# Altium PCB ESP32_Board.PcbDoc
Units mm, origin at the board's own origin, x right, y up, seen from the top; angles counter-clockwise.
Board outline 50 x 50 mm, 4 copper layers (Top Layer, Int1 (GND), Int2 (PWR), Bottom Layer), stack 0.628 mm thick; 64 components, 47 nets, 210 pads, 156 vias.
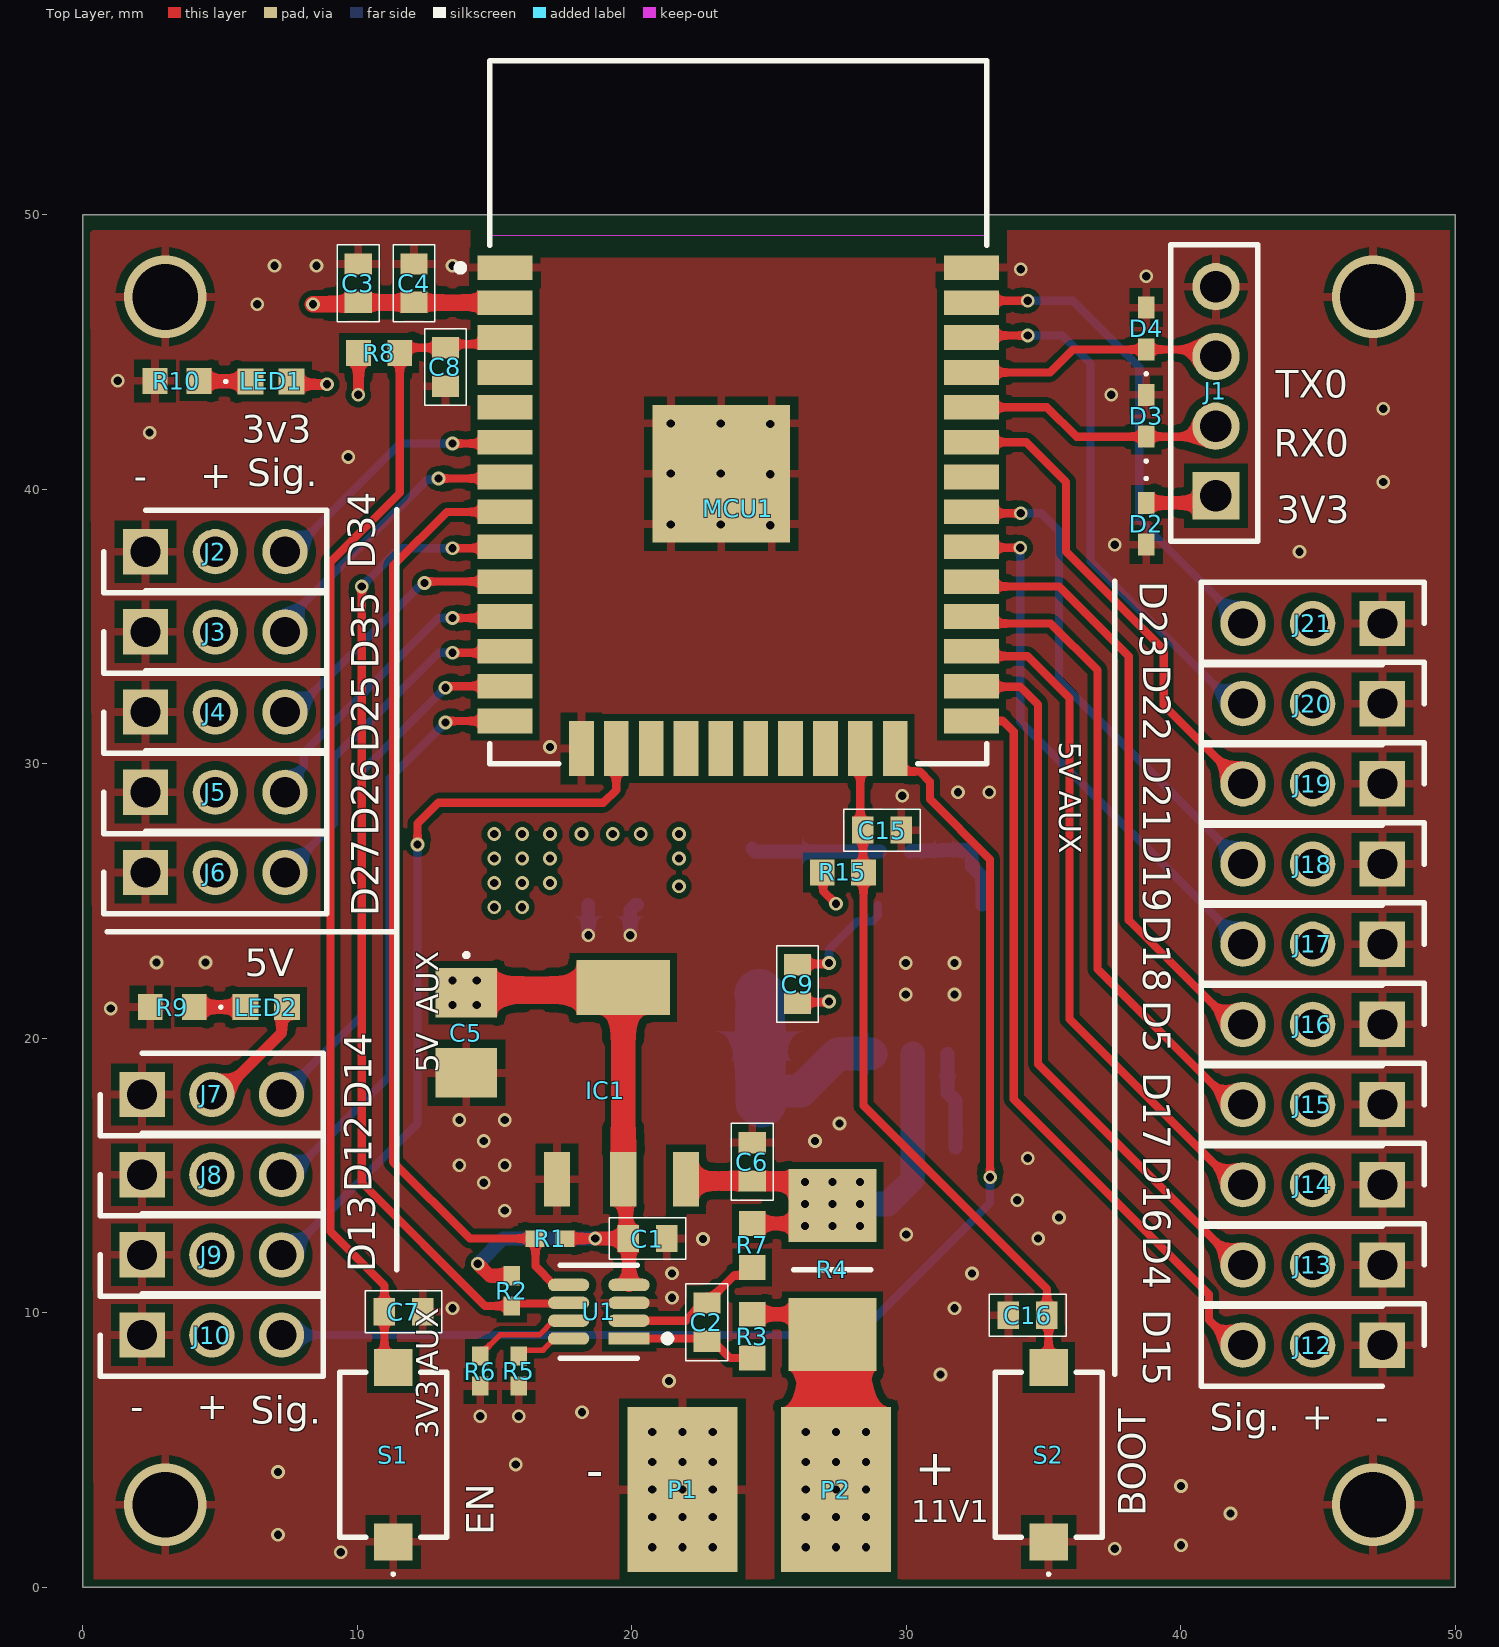
[diagram p0: Top Layer view]
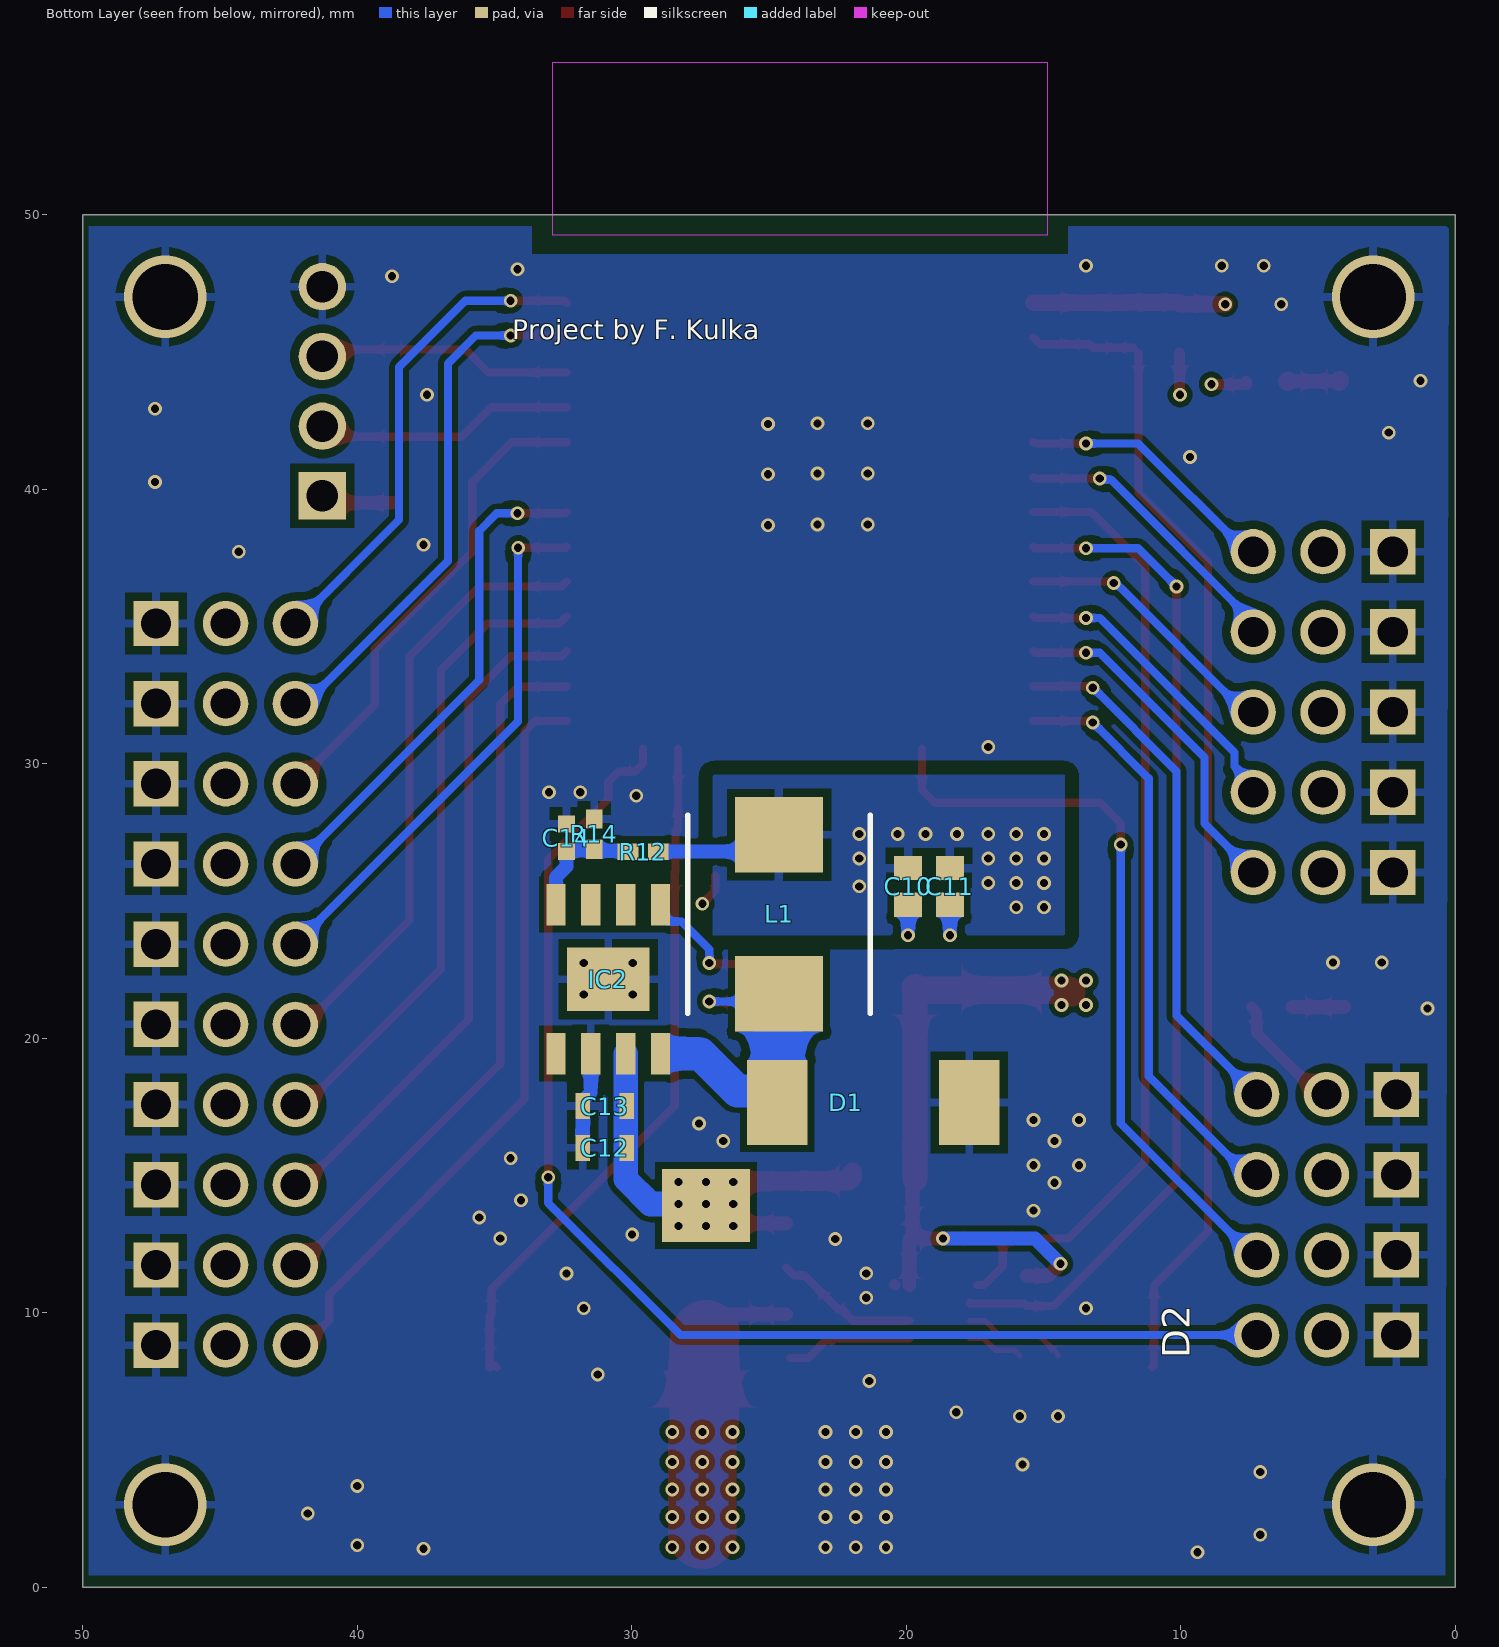
[diagram p1: Bottom Layer view, seen from below]
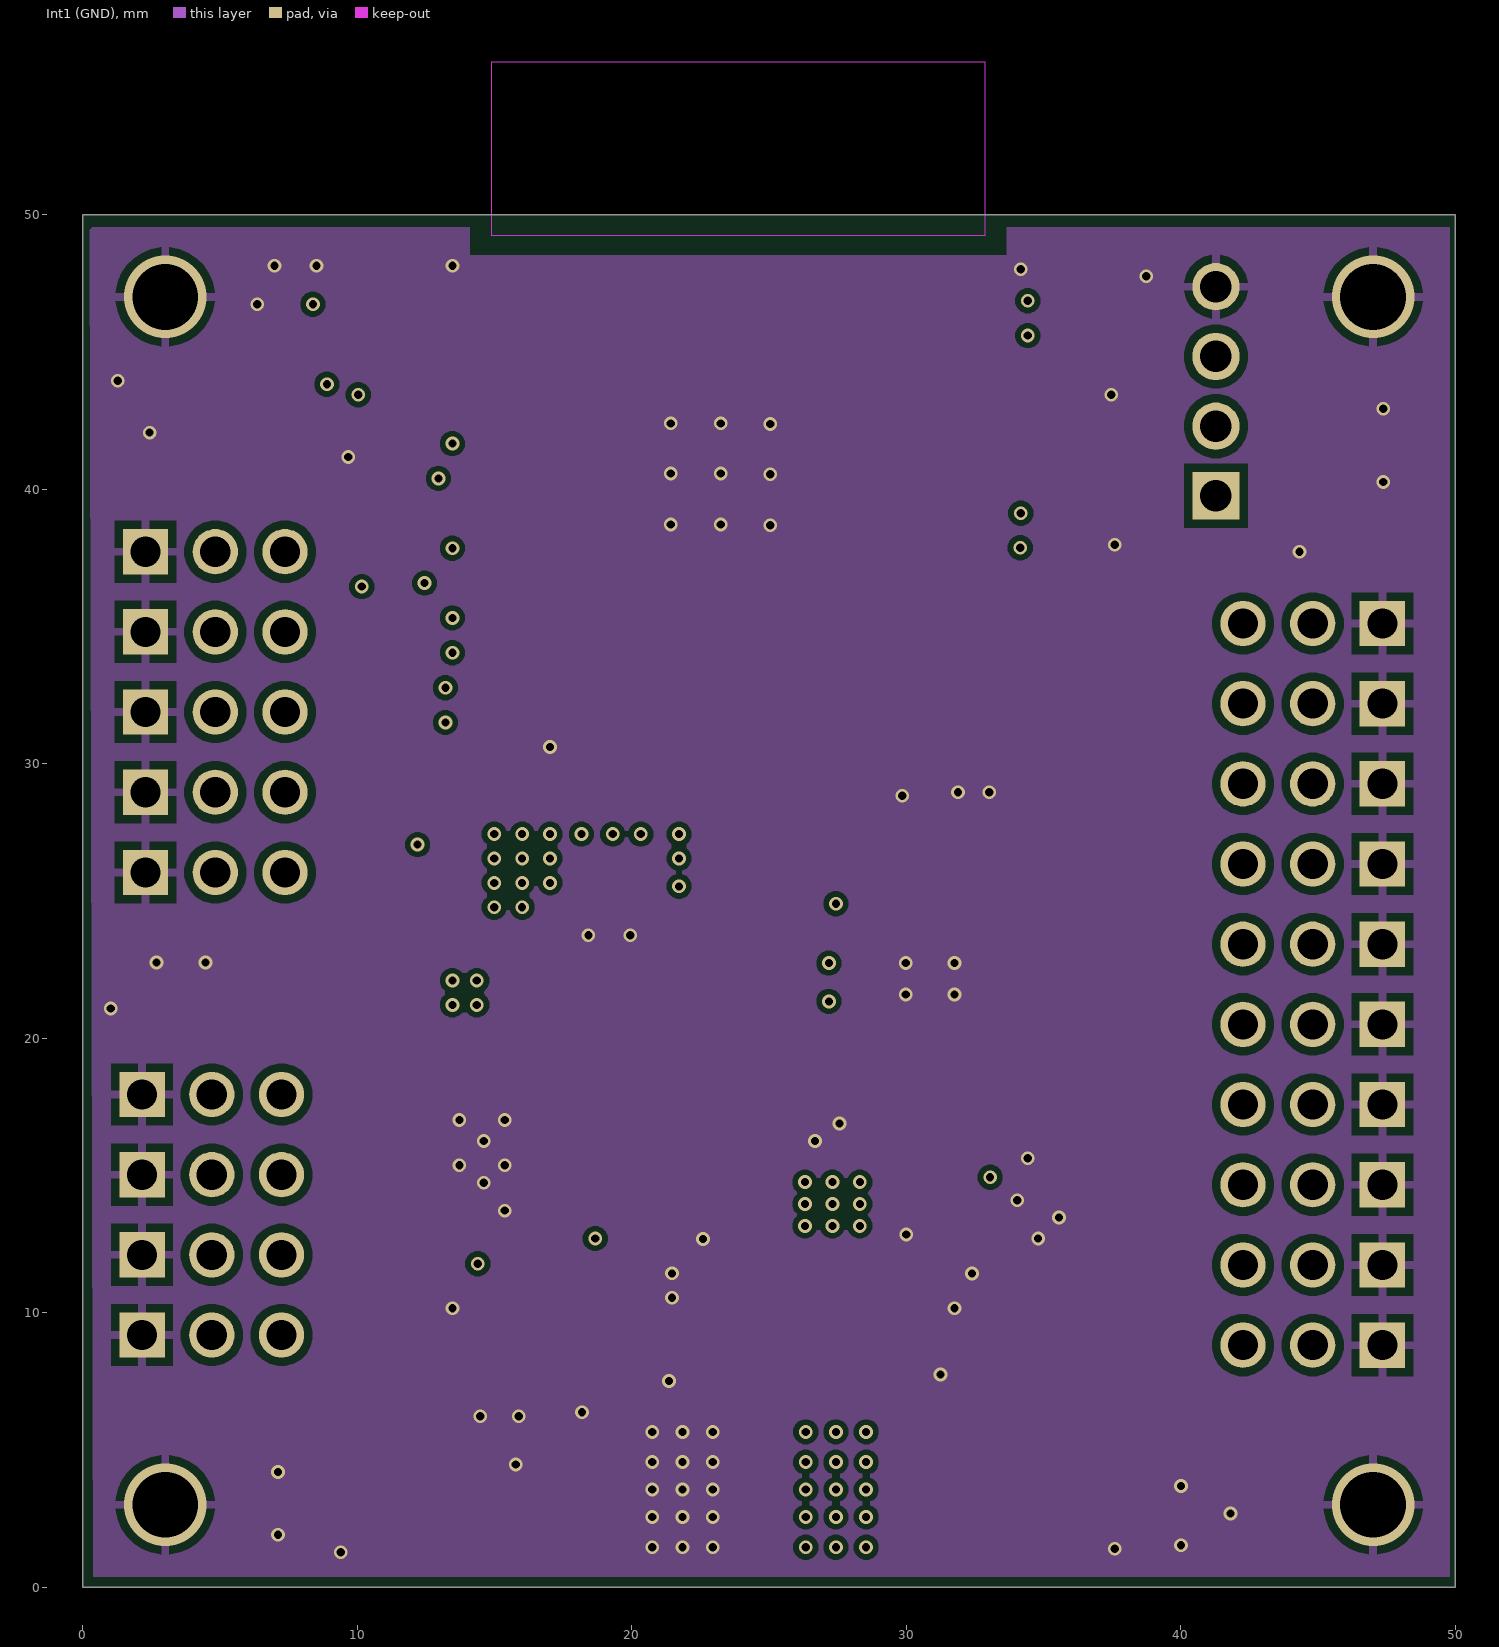
[diagram p2: Int1 (GND)]
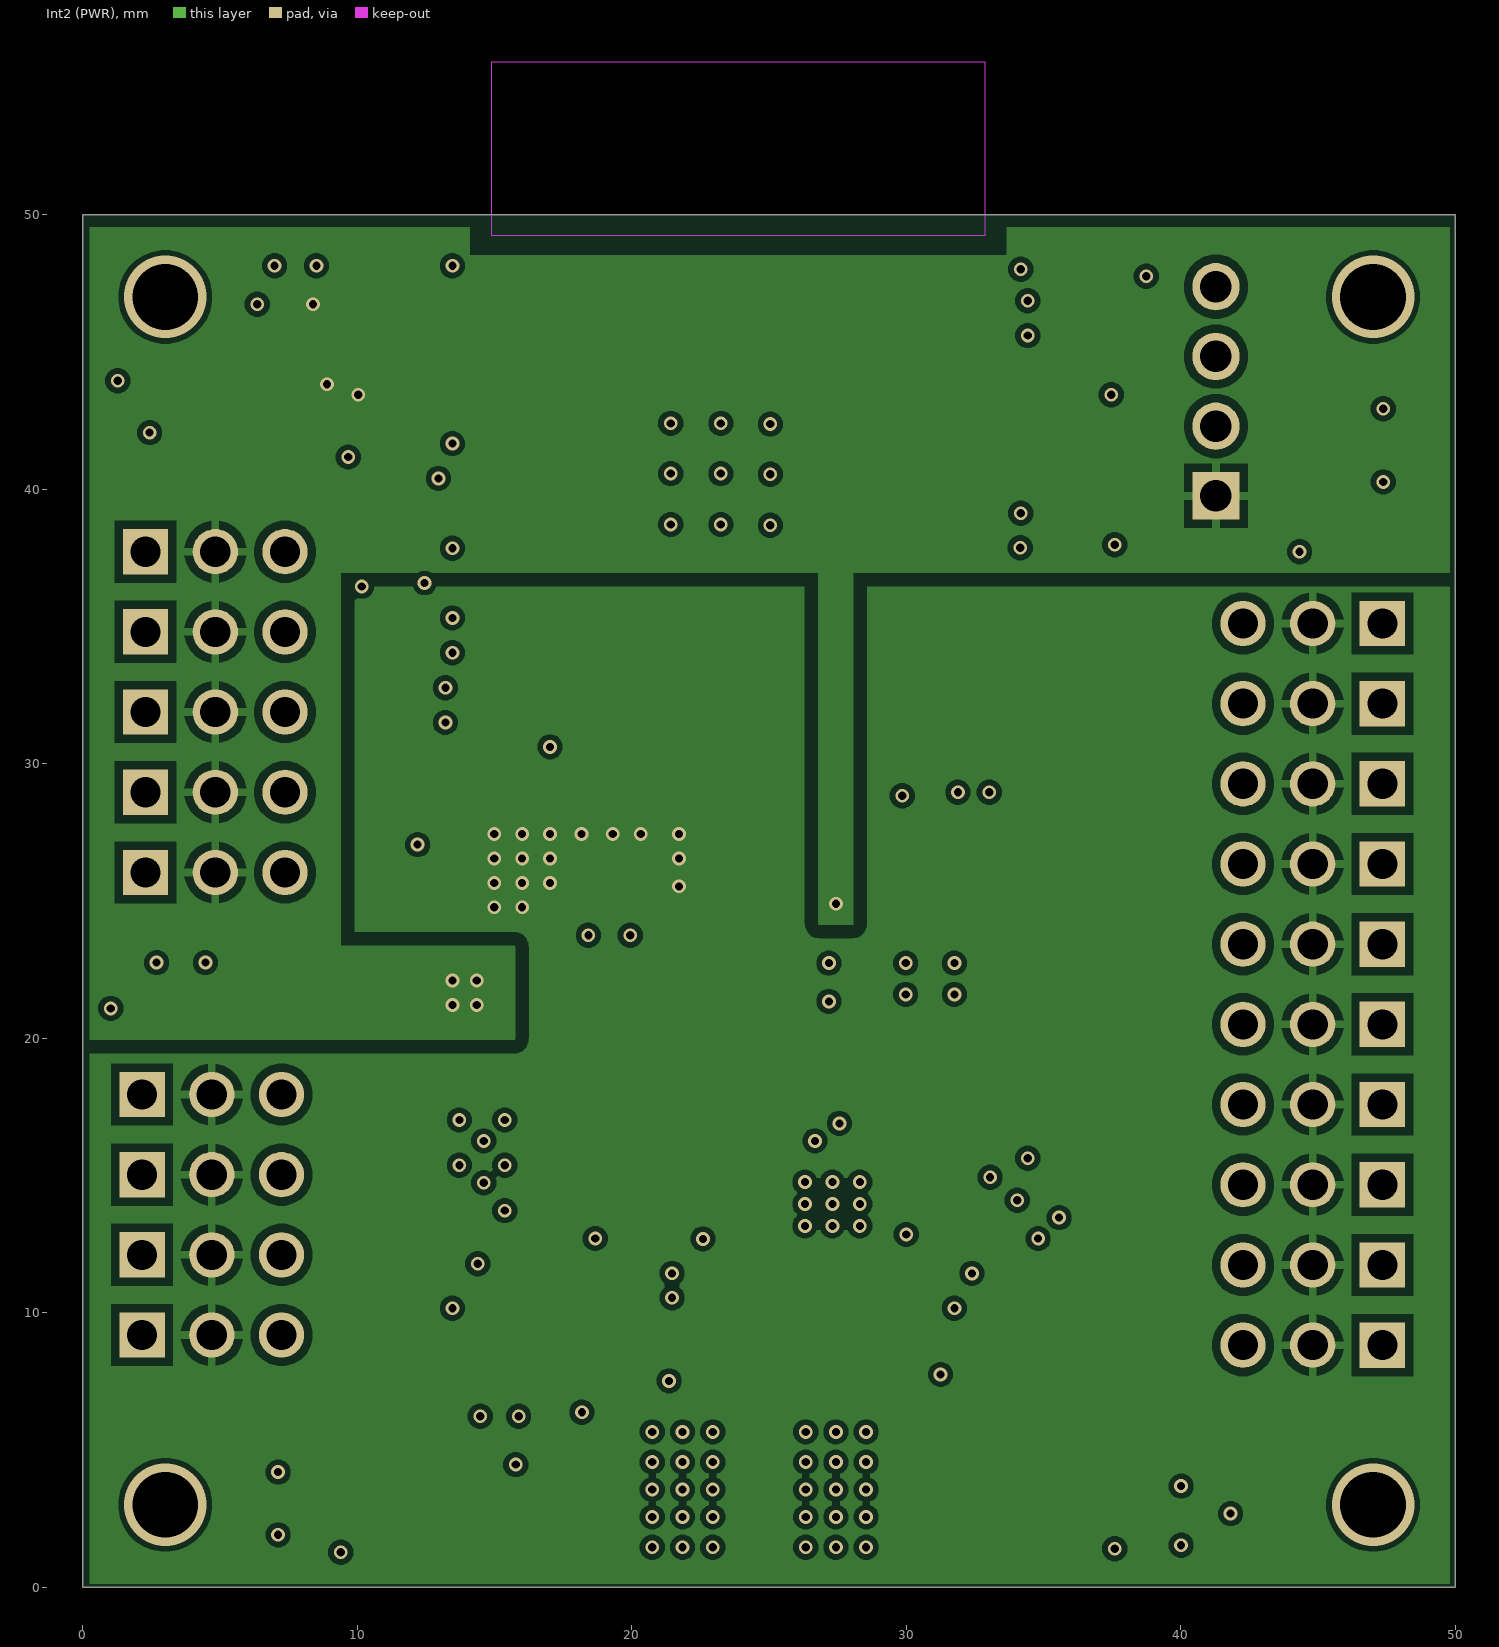
[diagram p3: Int2 (PWR)]
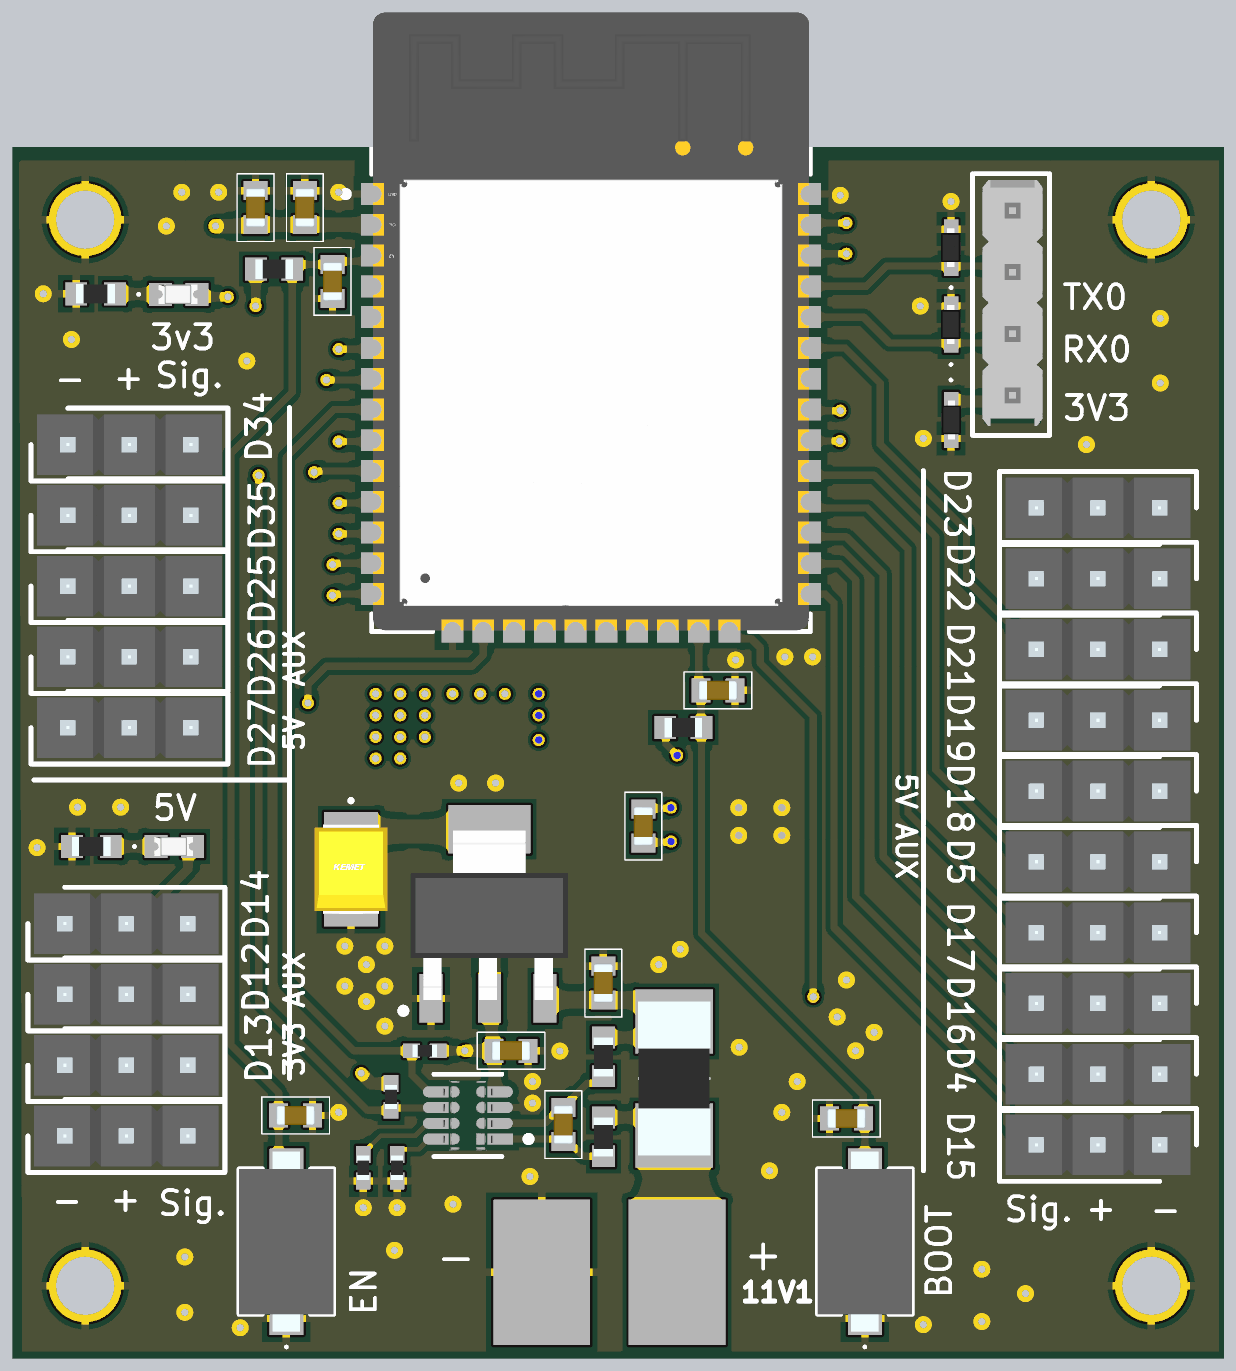
[diagram p4: 3D render of the assembled board from above, using the file's embedded part models]
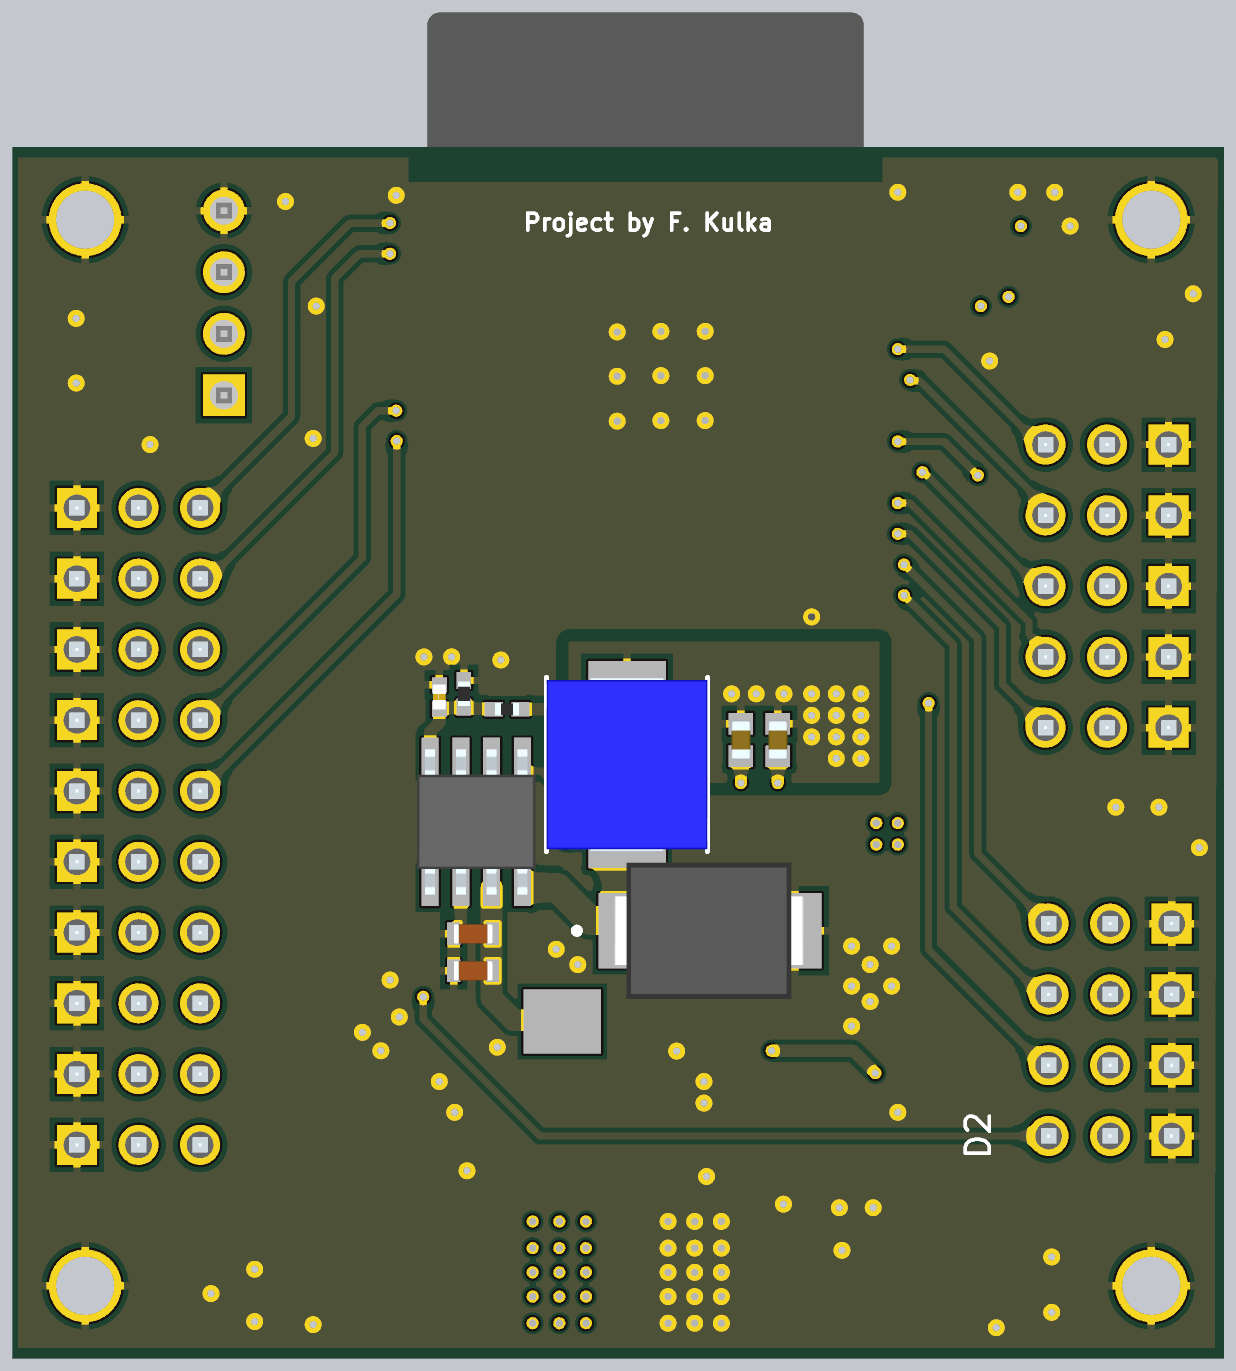
[diagram p5: 3D render of the assembled board from below, using the file's embedded part models]

## Layer stack, top to bottom
Top Solder: solder mask 0.0254, SM-001, Dk 4
Top Layer: signal copper 0.035
Dielectric 2: prepreg 0.2104, PP-016, Dk 4.4
Int1 (GND): signal copper 0.0152
Dielectric 3: core 0.1065, Core-039, Dk 4.6
Int2 (PWR): signal copper 0.0152
Dielectric 4: prepreg 0.2104, PP-016, Dk 4.4
Bottom Layer: signal copper 0.035
Bottom Solder: solder mask 0.0254, SM-001, Dk 4

## Board outline
0,0 50,0 50,50 0,50

## Design rules (kind name [scope] priority, off if disabled: settings)
Clearance "Different net constraints" [All] p1: gap=0.2 ignorepadtopadclearanceinfootprint=TRUE except(0: SMDPad-Hole THPad-Hole Via-Hole Fill-Hole Poly-Hole Region-Hole Hole-Hole; 0.15: Arc-Arc Arc-Track Arc-SMDPad Arc-Text Track-Track Track-SMDPad Track-Text SMDPad-Text Text-Text; 0.25: SMDPad-Fill SMDPad-Poly SMDPad-Region; 0.3: Arc-Hole Track-Hole THPad-Via THPad-Fill THPad-Poly THPad-Region Fill-Fill Fill-Poly Fill-Region Poly-Region Region-Region Text-Hole; 0.35: Arc-THPad Track-THPad THPad-Text; 0.45: THPad-THPad; 0.5: Poly-Poly)
Clearance Clearance_1 [(ExistsOnLayer('Int1 (GND)') Or ExistsOnLayer('Int2 (PWR)')) vs (ExistsOnLayer('Int1 (GND)') Or ExistsOnLayer('Int2 (PWR)'))] p2: gap=0.254 ignorepadtopadclearanceinfootprint=FALSE except(0: Arc-Hole Track-Hole SMDPad-Hole THPad-Hole Via-Hole Fill-Hole Poly-Hole Region-Hole Text-Hole)
Clearance Clearance_2 [(ExistsOnLayer('Top Layer') Or ExistsOnLayer('Bottom Layer')) vs (ExistsOnLayer('Top Layer') Or ExistsOnLayer('Bottom Layer'))] p3: gap=0.254 ignorepadtopadclearanceinfootprint=FALSE except(0: Arc-Hole Track-Hole SMDPad-Hole THPad-Hole Via-Hole Fill-Hole Poly-Hole Region-Hole Text-Hole)
Clearance [All] p4: gap=0.254 ignorepadtopadclearanceinfootprint=FALSE except(0: Arc-Hole Track-Hole SMDPad-Hole THPad-Hole Via-Hole Fill-Hole Poly-Hole Region-Hole Text-Hole)
HoleSize [All] p1: absolutevalues=TRUE maxlimit=6 minlimit=0.2 maxpercent=80.000 minpercent=20.000
HoleToHoleClearance [All] p1: gap=0.2 allowstackedmicrovias=FALSE
MinimumSolderMaskSliver [All] p1: minsoldermaskwidth=0.1
PlaneClearance [All] p1: clearance=0.5
PlaneConnect [All] p1: planeconnectstyle=Relief reliefexpansion=0.5 reliefentries=4 reliefconductorwidth=0.3 reliefairgap=0.3
PolygonConnect PolygonConnect_2 [All] p1: thpad.connectstyle=Relief thpad.reliefconductorwidth=0.3 thpad.reliefentries=4 thpad.polygonreliefangle="90 Angle" thpad.airgapwidth=0.3 smdpad.connectstyle=Relief smdpad.reliefconductorwidth=0.3 smdpad.reliefentries=4 smdpad.polygonreliefangle="90 Angle" smdpad.airgapwidth=0.3 via.connectstyle=Direct via.reliefconductorwidth=0.254 via.reliefentries=4 via.polygonreliefangle="90 Angle" via.airgapwidth=0.254
RoutingVias "Via dimentions" [All] p1: holewidth=0.3 width=0.5 viastyle="Through Hole" minholewidth=0.2 minwidth=0.3 maxholewidth=1 maxwidth=1
RoutingVias [All] p2: holewidth=0.711 width=1.27 viastyle="Through Hole" minholewidth=0.711 minwidth=1.27 maxholewidth=0.711 maxwidth=1.27
SilkToSilkClearance [All] p1: silktosilkclearance=0.2
SilkToSolderMaskClearance [IsPad] p1: minsilkscreentomaskgap=0.2 clearancetoexposedcopper=TRUE
SolderMaskExpansion [All] p1: expansion=0.1 istentingtop=FALSE
UnRoutedNet [All] p1: checkbadconnections=TRUE
ViasUnderSMD ViasUnderSMD_1 [All] p1: allowed=TRUE
Width "Width constraints" [All] p1: maxlimit=5 minlimit=0.2 preferedwidth=0.3 minimp=50.000000 maximp=50.000000 favimp=50.000000
Width [All] p2: maxlimit=0.254 minlimit=0.254 preferedwidth=0.254
22 further rules are at their usual default settings.

## Classes and differential pairs
component class ESP32-connectors&Battery: C15 C16 J2 J3 J4 J5 J6 J7 J8 J9 J10 J12 J13 J14 J15 J16 J17 J18 J19 J20 J21 P1 P2 R15 S2
net class N000-1_[0..35]: IO0 IO2 IO4 IO5 IO12 IO13 IO14 IO15 IO16 IO17 IO18 IO19 IO21 IO22 IO23 IO25 IO26 IO27 IO34 IO35 N000-1_1 N000-1_3 N000-1_6 N000-1_7 N000-1_8 N000-1_9 N000-1_10 N000-1_11 N000-1_20 N000-1_24 N000-1_28 N000-1_29 N000-1_30 N000-1_31 N000-1_32 N000-1_33
component class ESP32_Schematic: C1 C2 C3 C4 C5 C6 C7 C8 C9 C10 C11 C12 C13 C14 D1 D2 D3 D4 IC1 IC2 J1 L1 LED1 LED2 MCU1 R1 R2 R3 R4 R5 R6 R7 R8 R9 R10 R12 R14 S1 U1

## Components (designator, comment, footprint, x,y, rotation, side; value= is the part's Value field where it differs from the comment)
C1 "100n 16V" CAPC1608X90N 20.574,12.7 r0 top
C2 "100n 16V" CAPC1608X90N 22.733,9.652 r90 top
C3 "10u 25V" CAPC1608X90N 10.033,47.498 r90 top
C4 "100n 16V" CAPC1608X90N 12.065,47.498 r90 top
C5 "22u 6V3" T491B 13.97,20.193 r270 top
C6 "10u 25V" CAPC1608X90N 24.384,15.494 r90 top
C7 "100n 16V" CAPC1608X90N 11.684,10.033 r0 top
C8 "100n 16V" CAPC1608X90N 13.208,44.45 r270 top
C9 "10nF 50V" CAPC1608X90N 26.035,21.971 r270 top
C10 "22u 16V" CAPC1608X100N 19.939,25.527 r90 bottom
C11 "22u 16V" CAPC1608X100N 18.415,25.527 r90 bottom
C12 "4.7uF 25V" CAPC1608X80N 30.988,16.002 r180 bottom
C13 "4.7uF 25V" CAPC1608X80N 30.988,17.526 r180 bottom
C14 "82p 16V" C0402C104J4RACTU 32.385,27.305 r270 bottom
C15 "100n 16V" CAPC1608X90N 29.114,27.576 r0 top
C16 "100n 16V" CAPC1608X90N 34.417,9.906 r180 top
D1 "5A 50V" DIOM7959X250N 21.209,17.653 r180 bottom
D2 "TVS 3V3" PESD3V3U1UB115 38.735,38.735 r270 top
D3 "TVS 3V3" PESD3V3U1UB115 38.735,42.672 r90 top
D4 "TVS 3V3" PESD3V3U1UB115 38.735,45.847 r90 top
IC1 "LM1117IMPX-3.3" SOT230P700X180-4N 19.685,18.288 r90 top
IC2 "RT6285GSP" SOIC127P600X175-9N 30.861,22.145 r270 bottom
J1 "1x4 2.54mm pitch" HDRV4W66P0X254_1X4_1016X249X1003P 41.275,39.751 r90 top
J2 "2.54 pitch" HDRV3W64P0X254_1X3_762X250X952P 2.286,37.719 r0 top
J3 "2.54 pitch" HDRV3W64P0X254_1X3_762X250X952P 2.286,34.798 r0 top
J4 "2.54 pitch" HDRV3W64P0X254_1X3_762X250X952P 2.286,31.877 r0 top
J5 "2.54 pitch" HDRV3W64P0X254_1X3_762X250X952P 2.286,28.956 r0 top
J6 "2.54 pitch" HDRV3W64P0X254_1X3_762X250X952P 2.286,26.035 r0 top
J7 "2.54 pitch" HDRV3W64P0X254_1X3_762X250X952P 2.159,17.946 r0 top
J8 "2.54 pitch" HDRV3W64P0X254_1X3_762X250X952P 2.159,15.025 r0 top
J9 "2.54 pitch" HDRV3W64P0X254_1X3_762X250X952P 2.159,12.104 r0 top
J10 "2.54 pitch" HDRV3W64P0X254_1X3_762X250X952P 2.159,9.183 r0 top
J12 "2.54 pitch" HDRV3W64P0X254_1X3_762X250X952P 47.339,8.816 r180 top
J13 "2.54 pitch" HDRV3W64P0X254_1X3_762X250X952P 47.339,11.737 r180 top
J14 "2.54 pitch" HDRV3W64P0X254_1X3_762X250X952P 47.339,14.658 r180 top
J15 "2.54 pitch" HDRV3W64P0X254_1X3_762X250X952P 47.339,17.579 r180 top
J16 "2.54 pitch" HDRV3W64P0X254_1X3_762X250X952P 47.339,20.5 r180 top
J17 "2.54 pitch" HDRV3W64P0X254_1X3_762X250X952P 47.339,23.421 r180 top
J18 "2.54 pitch" HDRV3W64P0X254_1X3_762X250X952P 47.339,26.342 r180 top
J19 "2.54 pitch" HDRV3W64P0X254_1X3_762X250X952P 47.339,29.263 r180 top
J20 "2.54 pitch" HDRV3W64P0X254_1X3_762X250X952P 47.339,32.184 r180 top
J21 "2.54 pitch" HDRV3W64P0X254_1X3_762X250X952P 47.339,35.105 r180 top
L1 "15uH 5A" INDPM7266X300N 24.638,24.511 r90 bottom
LED1 "Green 2-2.4 Vfr" LEDC1608X80N 6.858,43.919 r0 top
LED2 "Green 2-2.4 Vfr" LEDC1608X80N 6.682,21.131 r0 top
MCU1 "ESP32-WROOM32D" ESP32-Wroom32D 23.876,42.799 r0 top
P1 "Battery pins with pad vias" "Battery Pad" 21.844,3.556 r0 top
P2 "Battery pins with pad vias" "Battery Pad" 27.432,3.556 r0 top
R1 "3k 1% .2W" RESC1005X40N 17.018,12.7 r180 top
R2 "3k 1% .2W" RESC1005X40N 15.621,10.795 r270 top
R3 "10R 1% .1W" RESC1608X55N 24.384,9.144 r270 top
R4 "R001 1% 3W" RESC6430X80N 27.305,11.557 r90 top
R5 "3k 1% .2W" RESC1005X40N 15.875,7.874 r270 top
R6 "3k 1% .2W" RESC1005X40N 14.478,7.874 r270 top
R7 "10R 1% .1W" RESC1608X55N 24.384,12.446 r270 top
R8 "10k 1% .1W" RESC1608X60N 10.795,44.958 r0 top
R9 "1k  1% .1W" RESC1608X55N 3.253,21.131 r180 top
R10 "1k  1% .1W" RESC1608X55N 3.429,43.942 r180 top
R12 "100k 1% .63W" RESC1005X35N 29.591,26.797 r180 bottom
R14 "31.6k 1% .1W" RESC1005X40N 31.369,27.432 r270 bottom
R15 "10k 1% .1W" RESC1608X60N 27.686,26.035 r0 top
S1 "switch" 434123025816 11.303,4.826 r90 top
S2 "switch" 434123025816 35.179,4.826 r90 top
U1 "INA219AIDCNR" FP-DCN0008A-IPC_B 18.796,10.033 r180 top

## Footprints (in the part's own frame and the unit in brackets; to place one, negate y for a bottom-side part, rotate by r counter-clockwise, add the part's x,y. Pads: shape width x height; smd on the part's side, far side on the other; paste and mask are expansions set on the pad)
434123025816 [mm]
  rect 1.35x1.4 smd: 1(-3.175,0) 2(3.175,0)
  silkscreen extent -4.4,-1.95 3,1.95, body extent -3.71,-1.95 3.71,1.95, height 2.75
"Battery Pad" [mm]
  rect 4x6 smd: 1(0,0)
C0402C104J4RACTU [mm]
  rect 0.62x0.62 smd: 1(-0.5,0) 2(0.5,0)
  body extent -0.52,-0.28 0.53,0.27, height 0.55
CAPC1608X80N [mm]
  rect 0.54x0.94 smd: 1(-0.8,0) 2(0.8,0)
  body extent -0.8,-0.4 0.8,0.4, height 0.8
CAPC1608X90N [mm]
  rect 0.78x0.99 smd: 1(-0.7,0) 2(0.7,0)
  silkscreen extent -1.4,-0.76 1.4,0.76, body extent -0.8,-0.41 0.8,0.41, height 0.9
CAPC1608X100N [mm]
  rect 0.89x1.02 smd: 1(-0.67,0) 2(0.67,0)
  body extent -0.8,-0.4 0.8,0.4, height 1
DIOM7959X250N [mm]
  rect 2.2x3.1 smd: 1(-3.5,0) 2(3.5,0)
  round 0.5 on Bottom Overlay: ""(-5.5,0)
  body extent -3.95,-2.81 3.85,2.81, height 2.5
ESP32-Wroom32D [mm] "WiFI ESP32 module with a pcb antenna"
  rect 2x0.9 smd paste+0 mask+0: 1(-8.5,5.26) 2(-8.5,3.99) 3(-8.5,2.72) 4(-8.5,1.45) 5(-8.5,0.18) 6(-8.5,-1.09) 7(-8.5,-2.36) 8(-8.5,-3.63) 9(-8.5,-4.9) 10(-8.5,-6.17) 11(-8.5,-7.44) 12(-8.5,-8.71) 13(-8.5,-9.98) 14(-8.5,-11.25) 25(8.5,-11.25) 26(8.5,-9.98) 27(8.5,-8.71) 28(8.5,-7.44) 29(8.5,-6.17) 30(8.5,-4.9) 31(8.5,-3.63) 32(8.5,-2.36) 33(8.5,-1.09) 34(8.5,0.18) 35(8.5,1.45) 36(8.5,2.72) 37(8.5,3.99) 38(8.5,5.26)
  rect 0.9x2 smd paste+0 mask+0: 15(-5.715,-12.25) 16(-4.445,-12.25) 17(-3.175,-12.25) 18(-1.905,-12.25) 19(-0.635,-12.25) 20(0.635,-12.25) 21(1.905,-12.25) 22(3.175,-12.25) 23(4.445,-12.25) 24(5.715,-12.25)
  rect 1.33x1.33 smd paste+0 mask+0: 39(-2.454,-4.075) 39(-2.454,-2.24) 39(-2.454,-0.405) 39(-0.619,-4.075) 39(-0.619,-0.405) 39(1.216,-4.075) 39(1.216,-2.24) 39(1.216,-0.405)
  rect 5x5 smd paste+0 mask+0: 39(-0.619,-2.24)
  Keep-Out Layer region: -9,6.45 9,6.45 9,12.75 -9,12.75
  Keep-Out Layer region: -9,6.45 9,6.45 9,12.75 -9,12.75
  silkscreen extent -10.25,-12.8 9.05,12.8, body extent -9,-12.75 9,12.75, height 3.2
FP-DCN0008A-IPC_B [mm]
  rect 1.505x0.455 smd paste+0 mask+0: 1(-1.1,0.975)
  rrect100% 1.505x0.455 smd paste+0 mask+0: 2(-1.1,0.325) 3(-1.1,-0.325) 4(-1.1,-0.975) 5(1.1,-0.975) 6(1.1,-0.325) 7(1.1,0.325) 8(1.1,0.975)
  silkscreen extent -2.63,-1.7 1.4,1.7, body extent -2.1,-1.7 2.1,1.7, height 0.25
HDRV3W64P0X254_1X3_762X250X952P [mm]
  rect 1.65x1.65 hole 1.1: 1(0,0)
  round 1.65 hole 1.1: 2(2.54,0) 3(5.08,0)
  silkscreen extent -1.52,-1.5 6.6,1.5, body extent -1.27,-1.25 6.35,1.25, height 9.52
HDRV4W66P0X254_1X4_1016X249X1003P [mm]
  rect 1.725x1.725 hole 1.15: 1(0,0)
  round 1.725 hole 1.15: 2(2.54,0) 3(5.08,0) 4(7.62,0)
  silkscreen extent -1.65,-1.52 9.14,1.65, body extent -1.27,-1.24 8.89,1.24, height 9.78
INDPM7266X300N [mm]
  rect 2.75x3.2 smd: 1(-2.9,0) 2(2.9,0)
  silkscreen extent -3.6,-3.32 3.6,3.32, body extent -3.6,-3.32 3.6,3.32, height 3
LEDC1608X80N [mm]
  rect 0.95x0.95 smd: 1(-0.75,0) 2(0.75,0)
  silkscreen extent -1.7,-0.05 -1.6,0.05, body extent -0.83,-0.4 0.77,0.4, height 0.7
PESD3V3U1UB115 [mm]
  rect 0.8x0.6 smd: 1(-0.762,0) 2(0.762,0)
  silkscreen extent -1.7,-0.05 -1.6,0.05, body extent -0.8,-0.42 0.8,0.41, height 0.61
RESC1005X35N [mm]
  rect 0.75x0.6 smd: 1(-0.55,0) 2(0.55,0)
  body extent -0.5,-0.25 0.5,0.25, height 0.35
RESC1005X40N [mm]
  rect 0.7x0.6 smd: 1(-0.55,0) 2(0.55,0)
  body extent -0.5,-0.25 0.5,0.25, height 0.4
RESC1608X55N [mm]
  rect 0.9x0.95 smd: 1(-0.8,0) 2(0.8,0)
  body extent -0.8,-0.4 0.8,0.4, height 0.55
RESC1608X60N [mm]
  rect 0.9x0.95 smd: 1(-0.75,0) 2(0.75,0)
  body extent -0.77,-0.4 0.77,0.4, height 0.6
RESC6430X80N [mm]
  rect 2.65x3.2 smd: 1(-2.35,0) 2(2.35,0)
  silkscreen extent 0,-1.4 0,1.4, body extent -3.17,-1.5 3.17,1.5, height 0.8
SOIC127P600X175-9N [mm]
  rect 1.522x0.7 smd: 1(-2.714,1.905) 2(-2.714,0.635) 3(-2.714,-0.635) 4(-2.714,-1.905) 5(2.714,-1.905) 6(2.714,-0.635) 7(2.714,0.635) 8(2.714,1.905)
  rect 2.3x3 smd: 9(0,0)
  body extent -3,-2.45 3,2.45, height 1.75
SOT230P700X180-4N [mm]
  rect 2x0.95 smd: 1(-3.429,2.413) 2(-3.429,0) 3(-3.429,-2.286)
  rect 2x3.4 smd: 4(3.556,0)
  round 0.5 on Top Overlay: ""(-3.937,3.556)
  body extent -3.5,-3.25 3.5,3.25, height 1.68
T491B [mm]
  rect 1.8x2.23 smd: 1(-1.46,0) 2(1.46,0)
  silkscreen extent -2.88,-0.05 -2.78,0.05, body extent -1.85,-1.5 1.85,1.5, height 2.1

## Part data
C1 C2 C4 C7 C8 C15 C16: library part 0603YC104K4T4A, "100nF 0603 16V", Manufacturer_Name="Kyocera AVX", Mouser Part Number=581-0603YC104K4T4A, Arrow Part Number=0603YC104K4T4A, Arrow Price/Stock=https://www.arrow.com/en/products/0603yc104k4t4a/avx, Datasheet Link=https://componentsearchengine.com/Datasheets/1/06031A100FAT2A.pdf, Height=0.9mm, Manufacturer_Part_Number=0603YC104K4T4A, Mouser Price/Stock=https://www.mouser.co.uk/ProductDetail/KYOCERA-AVX/0603YC104K4T4A?qs=Cej1j9ztgjEkPqVJkA4Bng%3D%3D
C3 C6: library part 06033D106KAT2A, "Cap. Ceramic 10uF 25V 10%", Manufacturer_Name="Kyocera AVX", Mouser Part Number=581-06033D106KAT2A, Arrow Part Number=06033D106KAT2A, Arrow Price/Stock=https://www.arrow.com/en/products/06033d106kat2a/avx?region=nac, Datasheet Link=https://componentsearchengine.com/Datasheets/1/06031A100FAT2A.pdf, Height=0.9mm, Manufacturer_Part_Number=06033D106KAT2A, Mouser Price/Stock=https://www.mouser.co.uk/ProductDetail/KYOCERA-AVX/06033D106KAT2A?qs=iLbezkQI%252BsjjhfqLL0ayMQ%3D%3D
C5: library part T491B226K006AT, "Capacitor Polarised", Manufacturer_Name=KEMET, Mouser Part Number=80-T491B226K006, Datasheet Link=https://content.kemet.com/datasheets/KEM_T2005_T491.pdf, Height=2.1mm, Manufacturer_Part_Number=T491B226K006AT, Mouser Price/Stock=https://www.mouser.co.uk/ProductDetail/KEMET/T491B226K006AT?qs=jcsBHvPDQt8yMdJgz62biA%3D%3D
C9: library part GCM188R71H103KA37J, "10nF 50V 0603", Manufacturer_Name="Murata Electronics", Mouser Part Number=81-GCM188R71H103KA7J, Arrow Part Number=GCM188R71H103KA37J, Arrow Price/Stock=https://www.arrow.com/en/products/gcm188r71h103ka37j/murata-manufacturing?region=nac, Datasheet Link=https://psearch.en.murata.com/capacitor/product/GCM188R71H103KA37%23.pdf, Height=0.9mm, Manufacturer_Part_Number=GCM188R71H103KA37J, Mouser Price/Stock=https://www.mouser.co.uk/ProductDetail/Murata-Electronics/GCM188R71H103KA37J?qs=N3Kl9KD794T3%2FxlXdF0Axg%3D%3D
C10 C11: library part CM105X5R226M16AT, "22uF 16V 0603 ceramic capacitor", Manufacturer_Name="Kyocera AVX", Mouser Part Number=581-CM105X5R226M16AT, Datasheet Link=https://www.mouser.de/datasheet/2/40/Kyocera_AVX_Components_CT_Series_e-2933596.pdf, Height=1mm, Manufacturer_Part_Number=CM105X5R226M16AT, Mouser Price/Stock=https://www.mouser.co.uk/ProductDetail/KYOCERA-AVX/CM105X5R226M16AT?qs=MyNHzdoqoQKX6cMyStcF%2FA%3D%3D
C12 C13: library part C1608X5R1E475K080AC, "4.7uF 25V 10% X5R", Manufacturer_Name=TDK, Mouser Part Number=810-C1608X5R1E475K, Arrow Part Number=C1608X5R1E475K080AC, Arrow Price/Stock=https://www.arrow.com/en/products/c1608x5r1e475k080ac/tdk?region=nac, Datasheet Link=https://product.tdk.com/info/en/catalog/datasheets/mlcc_commercial_midvoltage_en.pdf, Height=0.8mm, Manufacturer_Part_Number=C1608X5R1E475K080AC, Mouser Price/Stock=https://www.mouser.co.uk/ProductDetail/TDK/C1608X5R1E475K080AC?qs=dfay7wIA1uHUGZGvnFtOyQ%3D%3D
C14: library part C0402C820M4GACTU, "82pF 16V", Manufacturer_Name=KEMET, Datasheet Link=https://content.kemet.com/datasheets/KEM_C1002_X7R_SMD.pdf, Height=0.55mm, Manufacturer_Part_Number=C0402C820M4GACTU
D1: library part B550C-13-F, "Schotkky Diode", Manufacturer_Name="Diodes Incorporated", Mouser Part Number=621-B550C-F, Arrow Part Number=B550C-13-F, Arrow Price/Stock=https://www.arrow.com/en/products/b550c-13-f/diodes-incorporated?utm_currency=USD&region=nac, Datasheet Link=https://www.mouser.com/ds/2/115/ds13012-1142526.pdf, Height=2.5mm, Manufacturer_Part_Number=B550C-13-F, Mouser Price/Stock=https://www.mouser.co.uk/ProductDetail/Diodes-Incorporated/B550C-13-F?qs=UEP5Ic6BRave1jzuZzz4FA%3D%3D
D2 D3 D4: library part PESD3V3U1UB,115, "TVS diode 3V3 0402", Manufacturer_Name=Nexperia, Mouser Part Number=771-PESD3V3U1UB-T/R, Arrow Part Number=PESD3V3U1UB,115, Arrow Price/Stock=https://www.arrow.com/en/products/pesd3v3u1ub115/nexperia?region=nac, Datasheet Link=https://assets.nexperia.com/documents/data-sheet/PESD3V3U1UB.pdf, Height=0.65mm, Manufacturer_Part_Number=PESD3V3U1UB,115, Mouser Price/Stock=https://www.mouser.co.uk/ProductDetail/Nexperia/PESD3V3U1UB115?qs=LOCUfHb8d9uLhBP9O5uXGg%3D%3D
IC1: library part LM1117IMP-3.3_NOPB, "3V3 Linear regulator", Arrow Part Number=LM1117IMP-3.3/NOPB, Manufacturer_Name="Texas Instruments", Mouser Part Number=926-LM1117IMP3.3NOPB, Arrow Price/Stock=https://www.arrow.com/en/products/lm1117imp-3.3nopb/texas-instruments?utm_currency=USD&region=nac, Datasheet Link=https://www.ti.com/lit/ds/symlink/lm1117.pdf?ts=1607578196475&ref_url=https%253A%252F%252Fwww.google.com%252F, Height=1.8mm, Manufacturer_Part_Number=LM1117IMP-3.3/NOPB, Mouser Price/Stock=https://www.mouser.co.uk/ProductDetail/Texas-Instruments/LM1117IMP-3.3-NOPB?qs=X1J7HmVL2ZFbpN1TgOsjYQ%3D%3D, Supplier 1=Mouser, Supplier Part Number 1=926-LM1117IMP3.3NOPB
IC2: "Integrated Circuit", Manufacturer_Name=RICHTEK, Mouser Part Number=835-RT6285GSP, Datasheet Link=https://www.richtek.com/assets/product_file/RT6285/DS6285-00.pdf, Height=1.753mm, Manufacturer_Part_Number=RT6285GSP, Mouser Price/Stock=https://www.mouser.co.uk/ProductDetail/Richtek/RT6285GSP?qs=amGC7iS6iy9ag0U80PgEbw%3D%3D
J1: library part 22-28-4042, "Connector 1x4  / 2.54mm pitch  / Through Hole straight", Manufacturer_Name=Molex, Mouser Part Number=538-22-28-4042, Datasheet Link=https://www.molex.com/content/dam/molex/molex-dot-com/products/automated/en-us/salesdrawingpdf/423/42375/022284042_sd.pdf?inline, Height=10.03mm, Manufacturer_Part_Number=22-28-4042, Mouser Price/Stock=https://www.mouser.co.uk/ProductDetail/Molex/22-28-4042?qs=GAPJcf4kvdu6DqYOOlzdaQ%3D%3D
J2 J3 J4 J5 J6 J7 J8 J9 J10 J12 J13 J14 J15 J16 J17 J18 J19 J20 J21: library part PH1-03-UA, "Connector", Manufacturer_Name="Adam Tech", Mouser Part Number=737-PH1-03-UA, Arrow Part Number=PH1-03-UA, Arrow Price/Stock=https://www.arrow.com/en/products/ph1-03-ua/adam-tech?region=nac, Datasheet Link=https://datasheet.datasheetarchive.com/originals/distributors/Datasheets_SAMA/34c52fbb4019bb4b288b881302863af3.pdf, Height=9.516mm, Manufacturer_Part_Number=PH1-03-UA, Mouser Price/Stock=https://www.mouser.co.uk/ProductDetail/Adam-Tech/PH1-03-UA?qs=HoCaDK9Nz5cktq3WKneQTQ%3D%3D
L1: library part ASPI-0630LR-150M-T15, Manufacturer_Name=ABRACON, Mouser Part Number=815-ASPI0630LR150T15, Arrow Part Number=ASPI-0630LR-150M-T15, Arrow Price/Stock=https://www.arrow.com/en/products/aspi-0630lr-150m-t15/abracon?region=nac, Datasheet Link=https://abracon.com/Magnetics/power/ASPI-0630LR.pdf, Height=3mm, Manufacturer_Part_Number=ASPI-0630LR-150M-T15, Mouser Price/Stock=https://www.mouser.co.uk/ProductDetail/ABRACON/ASPI-0630LR-150M-T15?qs=bWAYEm3xoCYKmwZKzI2%2F7Q%3D%3D
LED1 LED2: library part 150060VS75000, "LED green 2-2.4 Vbr", Manufacturer_Name="Wurth Elektronik", Mouser Part Number=710-150060VS75000, Datasheet Link=https://componentsearchengine.com/Datasheets/2/150060VS75000.pdf, Height=0.8mm, Manufacturer_Part_Number=150060VS75000, Mouser Price/Stock=https://www.mouser.co.uk/ProductDetail/Wurth-Elektronik/150060VS75000?qs=LlUlMxKIyB1Q1Bi5mQ%2FKLw%3D%3D
MCU1: "ESP32 WiFi module with a pcb antenna"
P1 P2: library part "Battery Pad"
R1 R2 R5 R6: library part CRCW04023K00FKEDHP, "3k 1% .2W resistor 0402 package", Manufacturer_Name=Vishay, Arrow Part Number=CRCW04023K00FKEDHP, Arrow Price/Stock=https://www.arrow.com/en/products/crcw04023k00fkedhp/vishay?region=nac, Datasheet Link=http://www.vishay.com/docs/20035/dcrcwe3.pdf, Height=0.4mm, Manufacturer_Part_Number=CRCW04023K00FKEDHP
R3 R7: library part KTR03EZPF10R0, "10R 0603 1%", Manufacturer_Name="ROHM Semiconductor", Mouser Part Number=755-KTR03EZPF10R0, Datasheet Link=http://rohmfs.rohm.com/en/products/databook/datasheet/passive/resistor/chip_resistor/ktr.pdf, Height=0.55mm, Manufacturer_Part_Number=KTR03EZPF10R0, Mouser Price/Stock=https://www.mouser.co.uk/ProductDetail/ROHM-Semiconductor/KTR03EZPF10R0?qs=Z4wLSx0Y7o6aTc4EM6rn5w%3D%3D
R4: library part TLR3A30DR001FTDG, "R001 1% 3W 2512", Manufacturer_Name="TE Connectivity", Mouser Part Number=279-TLR3A30DR001FTDG, Arrow Part Number=TLR3A30DR001FTDG, Arrow Price/Stock=https://www.arrow.com/en/products/tlr3a30dr001ftdg/te-connectivity, Datasheet Link=https://www.te.com/commerce/DocumentDelivery/DDEController?Action=srchrtrv&DocNm=8-1773459-4_ELEVATOR_ESCALATOR_SOLUTIONS&DocType=Data%20Sheet&DocLang=English&PartCntxt=1879378-2&DocFormat=pdf, Height=0.8mm, Manufacturer_Part_Number=TLR3A30DR001FTDG, Mouser Price/Stock=https://www.mouser.co.uk/ProductDetail/TE-Connectivity-Holsworthy/TLR3A30DR001FTDG?qs=s1WWODT2SXXgi9KRS%2FP%252BSA%3D%3D
R8 R15: library part CRT0603-FZ-1002ELF, "10k Resistor 1% 1/10W 0603", Manufacturer_Name=Bourns, Mouser Part Number=652-CRT0603FZ1002ELF, Arrow Part Number=CRT0603-FZ-1002ELF, Arrow Price/Stock=https://www.arrow.com/en/products/crt0603-fz-1002elf/bourns, Datasheet Link=https://componentsearchengine.com/Datasheets/1/CRT0603-FZ-1002ELF.pdf, Height=0.6mm, Manufacturer_Part_Number=CRT0603-FZ-1002ELF, Mouser Price/Stock=https://www.mouser.com/Search/Refine.aspx?Keyword=652-CRT0603FZ1002ELF
R9 R10: library part CRT0603AFY-1001ELF, "1k Resistor 1% 1/10W 0603", Manufacturer_Name=Bourns, Datasheet Link=https://www.bourns.com/docs/Product-Datasheets/CRT-A.pdf, Height=0.55mm, Manufacturer_Part_Number=CRT0603AFY-1001ELF
R12: library part CRCW0402100KFKEDC, "100k 1% .63W 0402", Manufacturer_Name=Vishay, Mouser Part Number=71-CRCW0402100KFKEDC, Arrow Part Number=CRCW0402100KFKEDC, Arrow Price/Stock=https://www.arrow.com/en/products/crcw0402100kfkedc/vishay?utm_currency=USD&region=nac, Datasheet Link=http://www.vishay.com/docs/28773/crcwce3.pdf, Height=0.35mm, Manufacturer_Part_Number=CRCW0402100KFKEDC, Mouser Price/Stock=https://www.mouser.co.uk/ProductDetail/Vishay-Dale/CRCW0402100KFKEDC?qs=E3Y5ESvWgWPiKlL6PvtQMQ%3D%3D
R14: library part CR0402-FX-3162GLF, "31.6k 1% .1W 0402 resistor", Manufacturer_Name=Bourns, Datasheet Link=https://www.bourns.com/pdfs/CR0402.pdf, Height=0.4mm, Manufacturer_Part_Number=CR0402-FX-3162GLF
S1 S2: library part 434123025816, "Switch", Manufacturer_Name="Wurth Elektronik", Mouser Part Number=710-434123025816, Datasheet Link=https://www.we-online.com/catalog/datasheet/434123025816.pdf, Height=2.65mm, Manufacturer_Part_Number=434123025816, Mouser Price/Stock=https://www.mouser.co.uk/ProductDetail/Wurth-Elektronik/434123025816?qs=wr8lucFkNMVuWki%252Ba3C7oA%3D%3D
U1: library part CMP-0704-00041-3, "IC CURRENT MONITOR 1% SOT23-8", Case/Package=SOT-23-8, Input Offset Voltage (Vos)=100uV, Max Input Voltage=26V, Max Operating Temperature=125°C, Max Supply Current=5mA, Max Supply Voltage=5.5V, Min Input Voltage=0V, Min Operating Temperature=-40°C, Min Supply Voltage=3V, Nominal Supply Current=700uA, Operating Supply Current=1mA, Output Current=10mA, Package Quantity=3000, Accuracy=1%, Bandwidth=3.4MHz, Common Mode Rejection Ratio=100dB, Contact Plating=Gold, Features=I²C, Height=1.3mm, Lead Free="Lead Free", Length=3mm, Number of Amplifiers=1, Number of Pins=8, Output Current per Channel=10mA, Output Type=Digital, Packaging="Tape and Reel", Quiescent Current=700uA, Radiation Hardening=No, REACH SVHC="No SVHC", RoHS Compliant=Yes, Series=Zero-Drift, Supply Current=700uA, Weight=0.001411oz, Width=1.75mm

## Free pads (board coordinates)
  rect 3.2x2.65 smd far side: ""(27.305,13.907)

## Via types
v1: diameter 0.5, hole 0.3, Top Layer to Bottom Layer, 152 vias
v2: diameter 3, hole 2.4, Top Layer to Bottom Layer, 4 vias

## Nets (pads, with @x,y where several pads share a name; then routed paths per layer and width w, separated by ;. In a path a pad name is that pad's centre, name@x,y a point inside that pad or via, vN(x,y) a via of type N, cw(c..) or ccw(c..) an arc to the next point about the centre after c; other vN are vias at no path point)
3V3-OK: LED1.1 R10.1 | length 1.9
  Top Layer w0.5: R10.1@4.241,43.93 LED1.1@6.096,43.93
  Top Layer w0.7: R10.1 R10.1@4.241,43.93 ; LED1.1@6.096,43.93 LED1.1
5V-OK: LED2.1 R9.1 | length 1.9
  Top Layer w0.5: R9.1 LED2.1
11V1-BAT: P2.1 R3.1 R4.1 | length 11.4
  Top Layer w0.5: R3.1 26.568,9.944 R4.1 ; R4.1@26.696,8.344 R4.1@27.305,8.953
  Top Layer w2.5: R4.1 27.368,9.143 27.368,5.719 v1(27.432,5.656) v1(27.432,4.556) v1(27.432,3.556) v1(27.432,2.556) P2.1@27.432,1.905
  other v1: 26.332,1.456 27.432,1.456 28.532,1.456 26.332,2.556 28.532,2.556 26.332,3.556 28.532,3.556 26.332,4.556 28.532,4.556 26.332,5.656 28.532,5.656
+3V3: C1.1 C3.1 C4.1 C5.1 D2.1 IC1.2 IC1.4 J1.1 J2.2 J3.2 J4.2 J5.2 J6.2 LED1.2 MCU1.2 R1.1 R2.1 R8.1 R15.1 U1.4 | length 38.4
  Top Layer w0.3: R15.1@26.967,25.925 26.967,25.357 v1(27.432,24.892)
  Top Layer w0.4: LED1.2 7.608,43.815 v1(8.89,43.815) ; v1(10.033,43.434) 10.045,43.434 R8.1 ; R1.1 v1(18.669,12.7) ; C1.1@19.78,12.794 C1.1 ; U1.4@20.407,11.008 U1.4@20.432,11.033
  Top Layer w0.5: v1(14.389,11.778) 14.821,11.345 R2.1 ; v1(18.669,12.7) C1.1 ; C1.1@19.78,12.794 IC1.2@19.78,14.859 ; U1.4 C1.1@19.896,12.678 ; D2.1 41.275,39.497 J1.1
  Top Layer w0.6: v1(8.382,46.736) 10.033,46.736 C3.1 C4.1 ; C4.1@12.074,46.789 MCU1.2
  Top Layer w0.9: IC1.2 IC1.4
  Top Layer w1: C5.1 C5.1@14.066,21.749 ; C5.1@14.701,21.749 19.59,21.749 IC1.4
  Bottom Layer w0.5: v1(14.389,11.778) 15.311,12.7 v1(18.669,12.7)
  other v1: 13.462,21.209 14.351,21.209 13.462,22.098 14.351,22.098
+5V: C10.2 C11.2 J7.2 J8.2 J9.2 J10.2 J12.2 J13.2 J14.2 J15.2 J16.2 J17.2 J18.2 J19.2 J20.2 J21.2 L1.2 LED2.2 R12.2 | length 9.2
  Top Layer w0.4: J7.2 4.992,17.946 7.239,20.193 7.239,20.938 LED2.2
  Bottom Layer w0.5: L1.2@24.384,26.903 24.49,26.797 R12.2
  other v1: 14.986,24.765 16.002,24.765 21.717,25.527 14.986,25.654 16.002,25.654 17.018,25.654 14.986,26.543 16.002,26.543 17.018,26.543 21.717,26.543 14.986,27.432 16.002,27.432 17.018,27.432 18.161,27.432 19.304,27.432 20.32,27.432 21.717,27.432
BOOT: C9.1 IC2.1 | length 4.3
  Top Layer w0.3: C9.1@26.066,22.702 27.147,22.702 v1(27.178,22.733)
  Bottom Layer w0.3: v1(27.178,22.733) 27.178,23.233 28.193,24.248 28.756,24.248 28.956,24.448 IC2.1
CLK: MCU1.20
CMD: MCU1.19
EN: C7.1 C8.1 MCU1.3 R8.2 S1.2 | length 42.6
  Top Layer w0.3: S1.2@11.049,8.001 10.984,8.066 C7.1 10.984,10.987 9.017,12.954 9.017,37.338 11.545,39.866 R8.2 ; R8.2@11.737,45.15 C8.1 13.337,45.279 15.136,45.279 MCU1.3
ESP-RX0: D3.1 J1.2 MCU1.34 | length 9.5
  Top Layer w0.3: MCU1.34 35.126,42.979 36.195,41.91 40.508,41.91 40.889,42.291 J1.2
ESP-TX0: D4.1 J1.3 MCU1.35 | length 9.4
  Top Layer w0.3: MCU1.35 35.232,44.249 36.068,45.085 D4.1 41.021,45.085 J1.3
GND: C1.2 C3.2 C4.2 C5.2 C6.2 C7.2 C8.2 C10.1 C11.1 C12.1 C13.1 C14.1 C15.2 C16.2 D1.2 D2.2 D3.2 D4.2 IC1.1 IC2.6 IC2.9 J1.4 J2.1 J3.1 J4.1 J5.1 J6.1 J7.1 J8.1 J9.1 J10.1 J12.1 J13.1 J14.1 J15.1 J16.1 J17.1 J18.1 J19.1 J20.1 J21.1 MCU1.1 MCU1.15 MCU1.38 MCU1.39 P1.1 R5.2 R6.2 R9.2 R10.2 R14.1 S1.1 S2.1 U1.3 | length 5.9
  Bottom Layer w0.5: v1(18.415,23.749) C11.1 ; v1(19.939,23.749) 19.939,24.662 20.134,24.857 C10.1@20.193,24.857 ; IC2.6 31.496,18.018 31.788,17.726 C13.1 C12.1
  other v1: 9.398,1.27 37.592,1.397 20.744,1.456 21.844,1.456 22.944,1.456 40.005,1.524 7.112,1.905 20.744,2.556 21.844,2.556 22.944,2.556 41.808,2.679 20.744,3.556 21.844,3.556 22.944,3.556 40.005,3.683 7.112,4.191 15.767,4.464 20.744,4.556 21.844,4.556 22.944,4.556 20.744,5.656 21.844,5.656 22.944,5.656 14.478,6.223 15.875,6.223 18.18,6.369 21.355,7.512 31.242,7.747 13.462,10.16 31.75,10.16 21.463,10.541 21.463,11.43 32.385,11.429 22.59,12.686 34.798,12.7 29.991,12.846 35.56,13.462 15.367,13.716 34.036,14.097 14.605,14.732 13.716,15.367 15.367,15.367 34.417,15.621 14.605,16.256 26.67,16.256 27.559,16.891 13.716,17.018 15.367,17.018 1.016,21.082 29.972,21.59 31.75,21.59 29.972,22.733 31.75,22.733 2.686,22.752 4.464,22.752 29.845,28.829 31.877,28.956 33.02,28.956 17.018,30.607 44.323,37.719 37.592,37.973 25.044,38.684 21.412,38.71 23.241,38.71 47.371,40.259 25.044,40.538 21.412,40.564 23.241,40.564 9.671,41.167 2.432,42.056 25.044,42.367 21.412,42.393 23.241,42.393 47.371,42.926 37.465,43.434 1.27,43.942 6.35,46.736 38.735,47.752 34.163,48.006 6.985,48.133 8.509,48.133 13.462,48.133
  other v2: 3,3 47,3 3,47 47,47
IO0: C15.1 C16.1 MCU1.23 R15.2 S2.2 | length 25.4
  Top Layer w0.3: C15.1@28.321,27.576 MCU1.23 ; C15.1 28.414,26.057 R15.2 28.436,17.538 35.117,10.857 C16.1 ; S2.2@34.925,8.001 S2.2@34.99,8.066 ; S2.2 C16.1@35.179,9.906
IO2: J10.3 MCU1.24 | length 45.8
  Top Layer w0.3: MCU1.24 29.591,30.011 29.891,29.711 30.487,29.711 30.861,29.337 30.861,28.702 33.049,26.514 v1(33.049,14.928)
  Bottom Layer w0.3: J10.3@7.639,9.148 7.674,9.183 28.233,9.183 33.049,13.999 v1(33.049,14.928)
IO4: J13.3 MCU1.26 | length 25.7
  Top Layer w0.3: MCU1.26 32.397,32.798 34.155,32.798 34.798,32.155 34.798,19.05 J13.3@41.791,12.057
IO5: J16.3 MCU1.29 | length 21.9
  Top Layer w0.3: MCU1.29 32.556,36.449 35.56,36.449 38.1,33.909 38.1,24.294 41.724,20.67 J16.3@41.724,20.379
IO12: J8.3 MCU1.14 | length 21.3
  Top Layer w0.3: v1(13.208,31.496) 13.262,31.496 13.315,31.549 MCU1.14
  Bottom Layer w0.3: J8.3 7.586,15.025 11.176,18.615 11.176,29.464 v1(13.208,31.496)
IO13: J9.3 MCU1.16 | length 26.3
  Top Layer w0.3: v1(12.192,27.051) 12.192,27.813 12.954,28.575 18.967,28.575 19.431,29.039 MCU1.16
  Bottom Layer w0.3: J9.3@7.779,12.478 12.192,16.891 v1@12.192,26.959
IO14: J7.3 MCU1.13 | length 18.8
  Top Layer w0.3: v1(13.208,32.766) 13.262,32.766 13.315,32.819 MCU1.13
  Bottom Layer w0.3: J7.3@7.781,18.449 10.16,20.828 10.16,29.718 v1(13.208,32.766)
IO15: J12.3 MCU1.25 | length 27.7
  Top Layer w0.3: MCU1.25 33.526,31.549 33.909,31.166 33.909,17.78 41.021,10.668 41.021,9.733 41.938,8.816 J12.3
IO16: J14.3 MCU1.27 | length 24.4
  Top Layer w0.3: MCU1.27 32.551,33.914 34.409,33.914 35.941,32.382 35.941,20.701 J14.3@41.897,14.745
IO17: J15.3 MCU1.28 | length 23.3
  Top Layer w0.3: MCU1.28 32.633,35.102 35.256,35.102 36.957,33.401 36.957,22.516 41.773,17.7 J15.3@41.773,17.536
IO18: J17.3 MCU1.30 | length 19.6
  Top Layer w0.3: MCU1.30 32.41,37.865 v1(34.144,37.865)
  Bottom Layer w0.3: v1(34.144,37.865) 34.144,31.536 J17.3
IO19: J18.3 MCU1.31 | length 18.4
  Top Layer w0.3: MCU1.31 32.429,39.116 v1(34.163,39.116)
  Bottom Layer w0.3: v1(34.163,39.116) 34.925,39.116 35.56,38.481 35.56,33.041 J18.3
IO21: J19.3 MCU1.33 | length 17.4
  Top Layer w0.3: MCU1.33@32.377,41.708 34.365,41.708 35.814,40.259 35.814,37.719 39.37,34.163 39.37,32.131 41.884,29.617 J19.3@41.884,29.363
IO22: J20.3 MCU1.36 | length 19.7
  Top Layer w0.3: MCU1.36 32.45,45.593 v1(34.417,45.593)
  Bottom Layer w0.3: v1(34.417,45.593) 35.687,45.593 36.703,44.577 36.703,37.375 41.893,32.184 J20.3
IO23: J21.3 MCU1.37 | length 18
  Top Layer w0.3: MCU1.37 32.45,46.863 v1(34.417,46.863)
  Bottom Layer w0.3: v1(34.417,46.863) 34.421,46.859 36.072,46.859 38.481,44.45 38.481,38.883 J21.3
IO25: J4.3 MCU1.10 | length 10
  Top Layer w0.3: v1(12.446,36.576) 12.5,36.576 12.553,36.629 MCU1.10
  Bottom Layer w0.3: J4.3 7.675,31.877 12.209,36.411 12.227,36.411 12.392,36.576 v1(12.446,36.576)
IO26: J5.3 MCU1.11 | length 11.1
  Top Layer w0.3: v1(13.462,35.306) 15.323,35.306 MCU1.11
  Bottom Layer w0.3: J5.3 7.366,29.213 8.051,29.899 8.051,30.403 12.954,35.306 v1(13.462,35.306)
IO27: J6.3 MCU1.12 | length 12.8
  Top Layer w0.3: v1(13.462,34.036) 15.323,34.036 MCU1.12
  Bottom Layer w0.3: J6.3@7.366,26.051 J6.3 9.144,27.813 9.144,30.226 12.954,34.036 v1(13.462,34.036)
IO34: J2.3 MCU1.6 | length 9.7
  Top Layer w0.3: v1(13.462,41.656) 15.323,41.656 MCU1.6
  Bottom Layer w0.3: J2.3 7.62,37.719 11.557,41.656 v1(13.462,41.656)
IO35: J3.3 MCU1.7 | length 10.6
  Top Layer w0.3: v1(12.954,40.386) 15.323,40.386 MCU1.7
  Bottom Layer w0.3: J3.3 7.366,35.163 12.554,40.351 12.919,40.351 v1(12.954,40.386)
SCL: MCU1.8 R1.2 U1.5 | length 35.2
  Top Layer w0.3: MCU1.8 13.261,39.169 11.303,37.211 11.303,15.494 14.097,12.7 R1.2 ; R1.2@16.487,12.7 16.487,11.691 17.17,11.008 U1.5@17.433,11.008
SD0: MCU1.21
SD1: MCU1.22
SD2: MCU1.17
SD3: MCU1.18
SDA: MCU1.9 R2.2 U1.6 | length 37
  Top Layer w0.3: v1(10.16,36.449) 10.16,14.732 14.647,10.245 R2.2 15.711,10.335 17.672,10.335 U1.6 ; v1(13.462,37.846) 15.323,37.846 MCU1.9
  Bottom Layer w0.3: v1(10.16,36.449) 11.557,37.846 v1(13.462,37.846)
Sensor_VN: MCU1.5
Sensor_VP: MCU1.4
SW: C9.2 D1.1 IC2.8 L1.1 | length 12.1
  Top Layer w0.3: C9.2@26.068,21.304 27.146,21.304 v1(27.178,21.336)
  Bottom Layer w0.3: L1.1 24.913,21.336 v1(27.178,21.336)
  Bottom Layer w1.2: D1.1@24.882,18.08 26.155,18.08 27.506,19.431 IC2.8@28.706,19.431
  Bottom Layer w1.8: L1.1 24.674,21.575 24.674,17.688 D1.1
U1-A0: R6.1 U1.7 | length 3.8
  Top Layer w0.2: R6.1 14.478,8.474 15.195,9.191 16.628,9.191 17.145,9.708 U1.7
U1-A1: R5.1 U1.8 | length 2.1
  Top Layer w0.2: R5.1 15.875,8.436 16.075,8.636 16.764,8.636 17.186,9.058 U1.8
U1_IN+: C2.1 R3.2 U1.1 | length 4.6
  Top Layer w0.3: U1.1@19.907,9.069 U1.1 22.627,9.058 C2.1 ; C2.1@22.849,9.068 23.573,8.344 R3.2@24.232,8.344
U1_IN-: C2.2 R7.2 U1.2 | length 5.3
  Top Layer w0.3: U1.2 21.962,9.708 22.366,10.112 22.471,10.112 23.714,11.355 24.093,11.355 R7.2
V-BAT: C6.1 C12.2 C13.2 IC1.3 IC2.7 pad. R4.2 R7.1 | length 15.7
  Top Layer w0.5: R7.1 R4.2@26.305,13.246
  Top Layer w0.7: IC1.3@21.971,15.113 21.971,14.919 22.096,14.794 C6.1 26.418,14.794 R4.2@27.28,13.932
  Bottom Layer w0.9: v1(27.305,13.957) v1(28.305,13.957) 29.324,13.957 30.226,14.859 IC2.7
  other v1: 26.305,13.157 27.305,13.157 28.305,13.157 26.305,13.957 26.305,14.757 27.305,14.757 28.305,14.757
V_ref: C14.2 IC2.4 R12.1 R14.2 | length 4.4
  Bottom Layer w0.5: R12.1 30.165,26.821 31.266,26.821 31.3,26.855 C14.2@32.385,26.855 ; C14.2 32.385,26.245 32.76,25.87 32.76,24.865 IC2.4
pads on no net: D1. IC1. IC2.2 IC2.3 IC2.5 MCU1.32

## Polygon pours and split planes (outlines as drawn)
+5V on Int2 (PWR) "NONET_L01_P-001" (solid, pour order 43): 9.398,36.957 49.784,36.957 49.784,0.127 0.254,0.127 0.254,19.685 15.748,19.685 15.748,23.368 9.398,23.368
+3V3 on Int2 (PWR) "NONET_L01_P-001" (solid, pour order 44): 26.797,36.957 26.797,24.13 28.067,24.13 28.067,36.957
+3V3 on Int2 (PWR) "NONET_L01_P-001" (solid, pour order 41): 15.748,19.939 0.254,19.939 0.254,49.53 49.784,49.53 49.784,36.957 9.398,36.957 9.398,23.368 15.748,23.368
GND on Bottom Layer "GND_L04_P052" (solid, remove dead copper, pour order 52): 0.253,49.574 14.096,49.574 14.096,48.558 33.654,48.558 33.654,49.574 49.783,49.574 49.783,0.425 0.38,0.425
+5V on Bottom Layer "NONET_L01_P-001" (solid, pour order 18): 27.051,29.591 27.051,23.749 14.224,23.749 14.224,29.591
GND on Int1 (GND) "GND_L02_P051" (solid, pour order 51): 0.254,49.53 14.097,49.53 14.097,48.514 33.655,48.514 33.655,49.53 49.784,49.53 49.784,0.381 0.381,0.381
GND on Top Layer "GND_L01_P053" (solid, pour order 53): 0.271,49.436 14.114,49.436 14.114,48.42 33.672,48.42 33.672,49.436 49.801,49.436 49.801,0.287 0.398,0.287

## Other copper
Int2 (PWR):
  pour cut-out: 14.097,49.53 14.097,48.514 33.655,48.514 33.655,49.53
Bottom Layer:
  pour cut-out: 17.906,23.239 20.448,23.239 20.448,24.062 20.398,24.112 17.956,24.112 17.956,23.25 17.955,23.249

## Silkscreen, mask and mechanical layers (free items; w line width, h text height)
Top Overlay:
  lines w0.2: 0.889,23.876 1.27,23.876 1.953,23.876 3.746,23.876 8.7,23.876 11.43,23.876 ; 11.43,11.557 11.43,23.876 ; 11.43,39.243 11.43,25.781 11.43,23.876 ; 37.592,7.747 37.592,8.763 37.592,21.971 ; 37.592,22.034 37.592,36.639
  text "TX0" at 43.45,43.33 h1
  text "3v3" at 5.795,41.679 h1
  text "RX0" at 43.385,41.171 h1
  text "Sig." at 5.993,40.107 h1
  text "+" at 4.271,40.028 h1
  text "-" at 1.858,39.981 h1
  text "3V3" at 43.471,38.758 h1
  text "D34" at 10.645,37.095 h1 r90
  text "D23" at 38.504,36.645 h1 r270
  text "D22" at 38.631,33.597 h1 r270
  text "D35" at 10.772,33.459 h1 r90
  text "5V AUX" at 35.56,30.798 h0.8 r270
  text "D25" at 10.772,30.411 h1 r90
  text "D21" at 38.631,30.303 h1 r270
  text "D19" at 38.631,27.394 h1 r270
  text "D26" at 10.772,27.363 h1 r90
  text "D18" at 38.631,24.473 h1 r270
  text "D27" at 10.772,24.442 h1 r90
  text "5V" at 5.895,22.248 h1
  text "D5" at 38.631,21.379 h1 r270
  text "D17" at 38.631,18.758 h1 r270
  text "5V  AUX" at 12.954,18.732 h0.8 r90
  text "D14" at 10.518,17.39 h1 r90
  text "D16" at 38.631,15.71 h1 r270
  text "D12" at 10.518,14.389 h1 r90
  text "D4" at 38.631,12.79 h1 r270
  text "D13" at 10.645,11.468 h1 r90
  text "D15" at 38.631,10.122 h1 r270
  text "+" at 4.144,6.119 h1
  text "-" at 1.731,6.072 h1
  text "Sig." at 6.12,5.944 h1
  text "+" at 44.403,5.738 h1
  text "Sig." at 41.045,5.69 h1
  text "-" at 47.07,5.691 h1
  text "3V3 AUX" at 12.954,5.397 h0.8 r90
  text "-" at 18.972,4.598 h1.3 r180
  text "+" at 30.304,3.706 h1.3
  text "BOOT" at 38.712,2.59 h1 r90
  text "11V1" at 30.169,2.359 h0.8
  text "EN" at 14.963,1.892 h1 r90
Bottom Overlay:
  text "Project by F. Kulka" at 34.362,45.466 h0.7
  text "D2" at 9.675,8.339 h1 r270
Board Outline:
  the board outline again, w0.1

## Dimensions
0,0 to 50,0 on Dimentions
0,0 to 0,50 on Dimentions